# Altium PCB PCB.PcbDoc (part 1 of 2)
Units mm, origin at the board's own origin, x right, y up, seen from the top; angles counter-clockwise.
Board outline 100.25 x 100.25 mm, 2 copper layers (Top Layer, Bottom Layer); 95 components, 92 nets, 457 pads, 117 vias.
Unrouted connection lines stored in the file: 24.
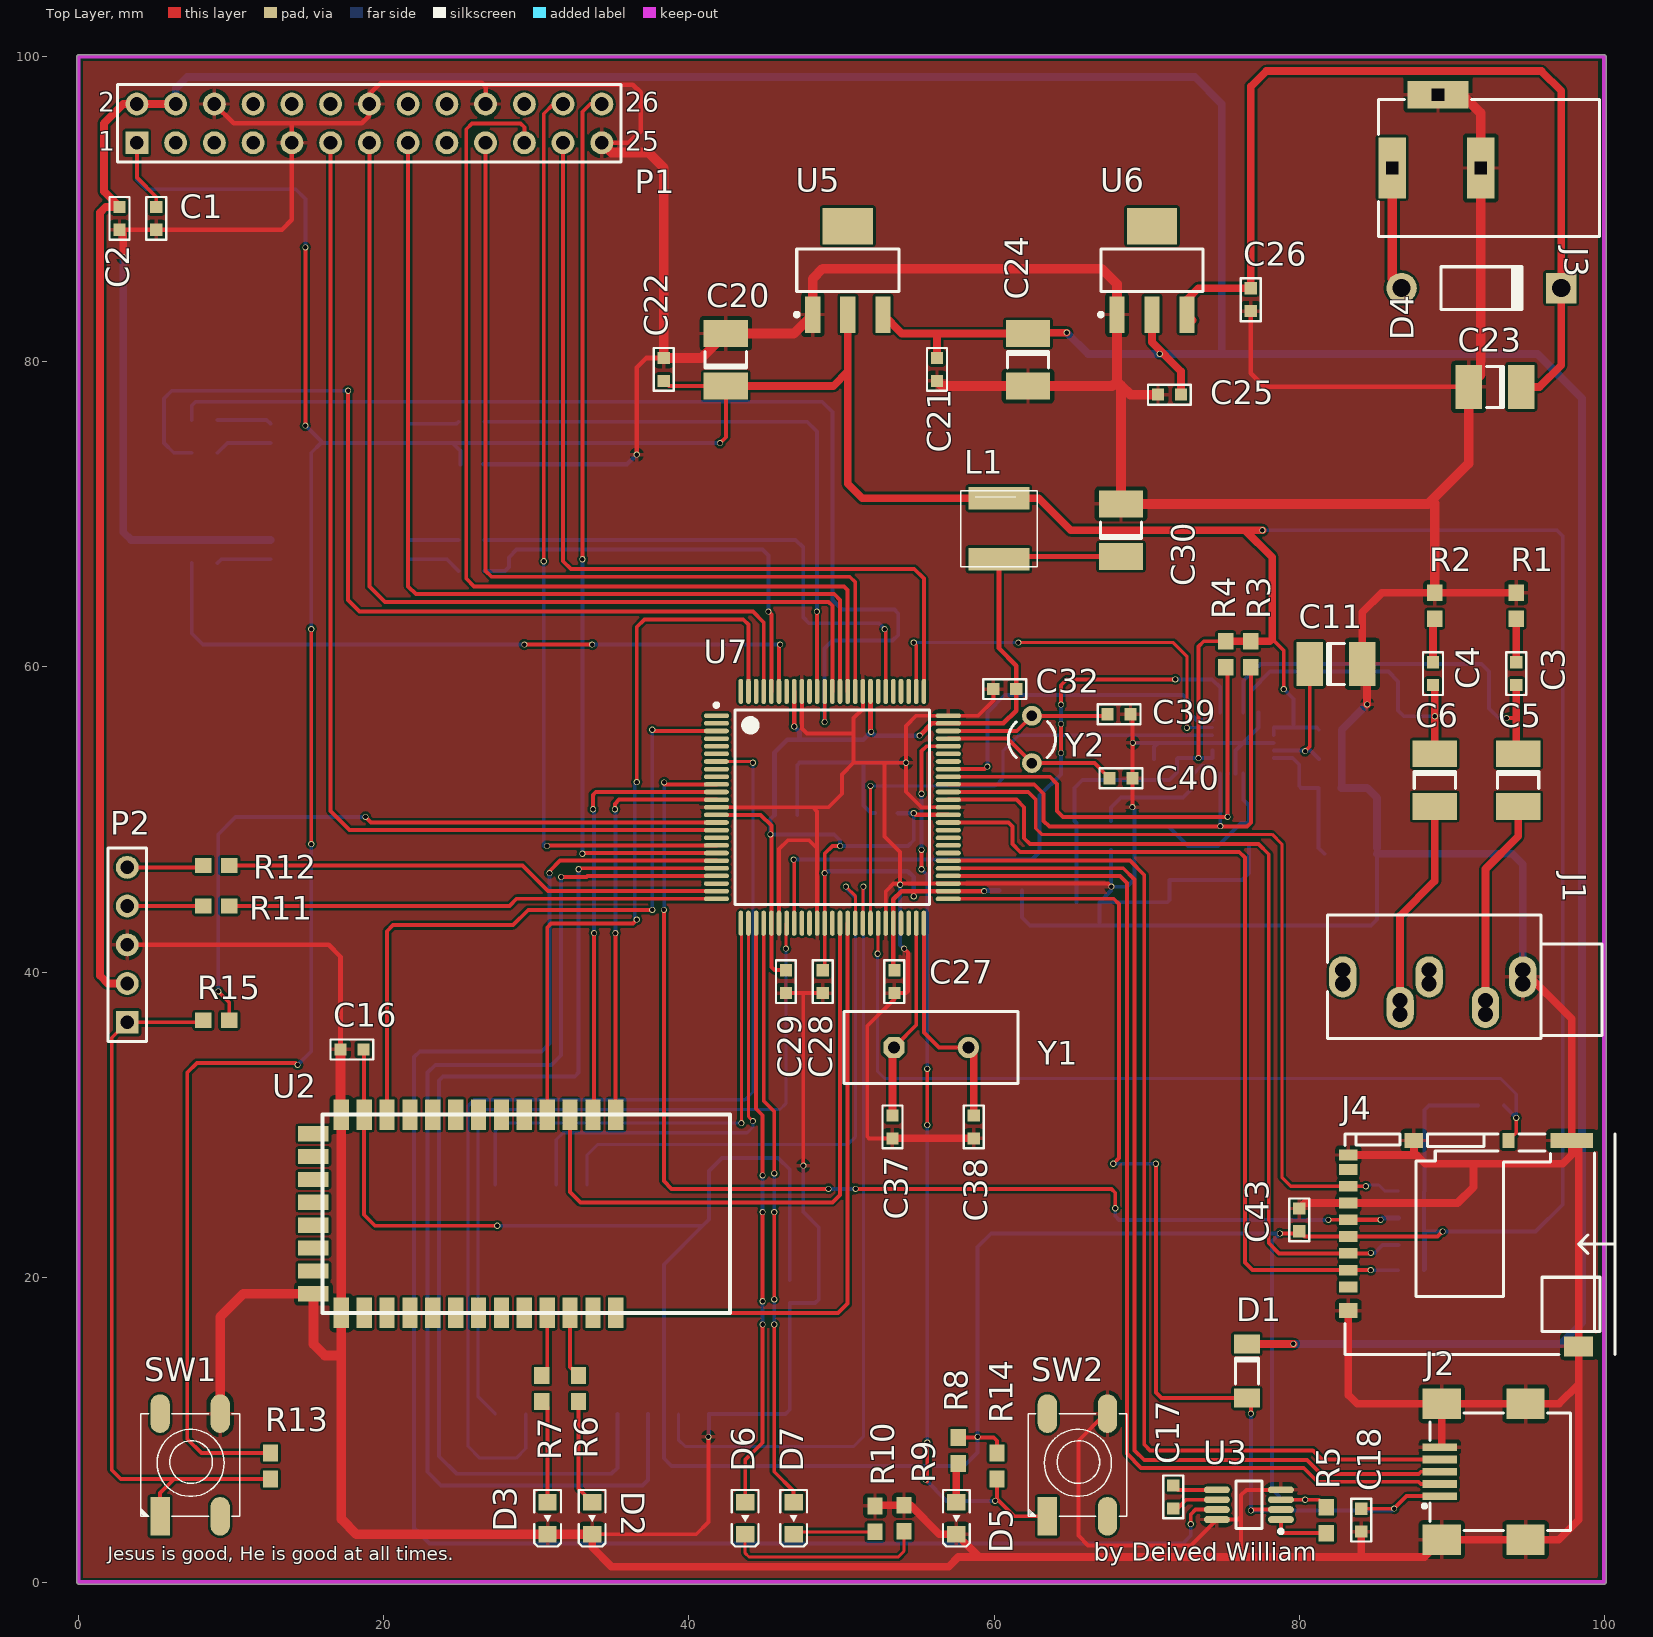
[diagram p0: Top Layer view]
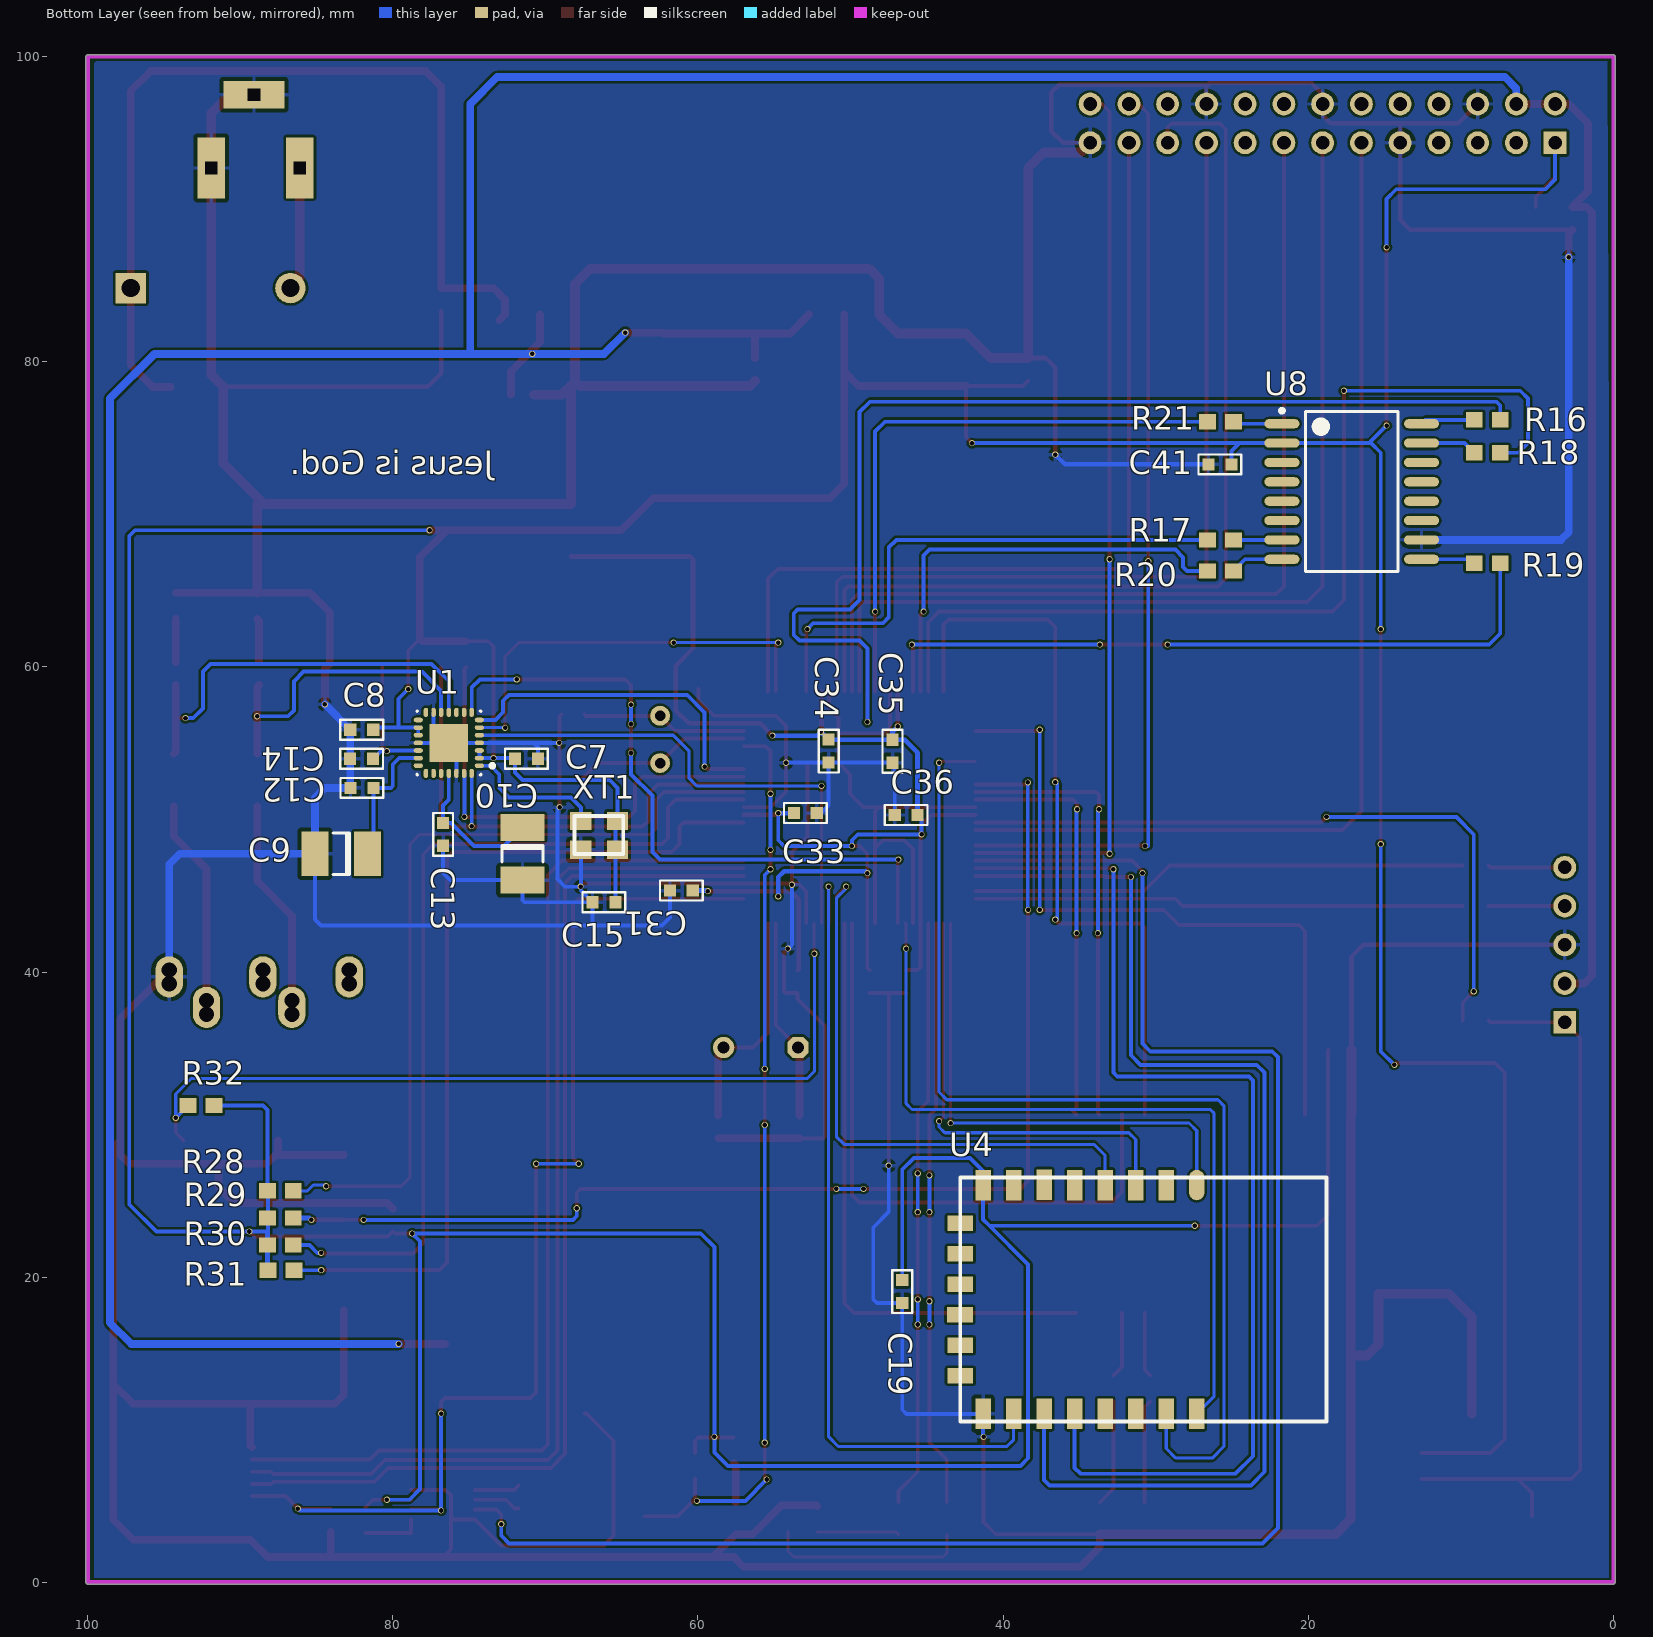
[diagram p1: Bottom Layer view, seen from below]

## Layer stack, top to bottom
Top Solder: solder mask 0.0102, Solder Resist, Dk 3.5
Top Layer: signal copper 0.0356
Dielectric 1: dielectric 0.32, FR-4, Dk 4.8
Bottom Layer: signal copper 0.0356
Bottom Solder: solder mask 0.0102, Solder Resist, Dk 3.5

## Board outline
-0.127,0 ccw(c0,0) 0,-0.127 100,-0.127 ccw(c100,0) 100.127,0 100.127,100 ccw(c100,100) 100,100.127 0,100.127 ccw(c0,100) -0.127,100

## Design rules (kind name [scope] priority, off if disabled: settings)
Clearance Clearance_1 [InPolygon] p1: gap=0.152 ignorepadtopadclearanceinfootprint=FALSE
Clearance [U7-InPolygon] p2: gap=0.1 ignorepadtopadclearanceinfootprint=FALSE except(0: Arc-Hole Track-Hole SMDPad-Hole THPad-Hole Via-Hole Fill-Hole Poly-Hole Region-Hole Text-Hole)
DiffPairsRouting [All] p1: maxlimit=1 minlimit=0.1 mostfreqgap=0.254 toplayer_minwidth=0.1 toplayer_maxwidth=1 toplayer_prefwidth=0.254 bottomlayer_minwidth=0.1 bottomlayer_maxwidth=1 bottomlayer_prefwidth=0.254 maxuncoupledlength=12.7
HoleSize [All] p1: absolutevalues=TRUE maxlimit=10 minlimit=0.025 maxpercent=80.000 minpercent=20.000
MinimumSolderMaskSliver [All] p1: minsoldermaskwidth=0.1
PolygonConnect [All] p1: connectstyle=Relief reliefconductorwidth=0.254 reliefentries=4 polygonreliefangle="90 Angle" airgapwidth=0.254
RoutingVias [All] p1: holewidth=0.3 width=0.4 viastyle="Through Hole" minholewidth=0.3 minwidth=0.4 maxholewidth=0.3 maxwidth=0.4
SilkToSilkClearance [All] p1: silktosilkclearance=0.1
SilkToSolderMaskClearance [IsPad] p1: minsilkscreentomaskgap=0.1 clearancetoexposedcopper=TRUE
SolderMaskExpansion [All] p1: expansion=0.1
Width [All] p1: maxlimit=2 minlimit=0.1 preferedwidth=0.254
25 further rules are at their usual default settings.

## Classes and differential pairs
component class CODEC: C3 C4 C5 C6 C7 C8 C9 C10 C11 C12 C13 C14 C15 J1 R1 R2 R3 R4 U1 XT1
component class Communication: C16 C17 C18 C19 D1 D2 D3 J2 R5 R6 R7 U2 U3 U4
component class "Decoupling Capacitors": C20 C21 C22 C23 C24 C25 C26 D4 D5 J3 R8 U5 U6
component class LCD: C1 C2 P1
component class MCU: C27 C28 C29 C30 C31 C32 C33 C34 C35 C36 C37 C38 C39 C40 D6 D7 L1 P2 R9 R10 R11 R12 R13 R14 R15 SW1 SW2 U7 Y1 Y2
component class "Memory Nor Flash": C41 R16 R17 R18 R19 R20 R21 U8
component class "SD CARD": C43 J4 R28 R29 R30 R31 R32
differential pair D: +D_P -D_N

## Components (designator, comment, footprint, x,y, rotation, side; value= is the part's Value field where it differs from the comment)
C1 "885012206020" "WCAP-CSGP_0603, 1.6x0.8x0.8mm_Reflow" 5.08,89.408 r90 top value=100nF
C2 "885012206020" "WCAP-CSGP_0603, 1.6x0.8x0.8mm_Reflow" 2.667,89.408 r90 top value=100nF
C3 "885012206020" "WCAP-CSGP_0603, 1.6x0.8x0.8mm_Reflow" 94.234,59.563 r90 top value=100nF
C4 "885012206020" "WCAP-CSGP_0603, 1.6x0.8x0.8mm_Reflow" 88.773,59.563 r90 top value=100nF
C5 "CC106D004M" D 94.361,52.578 r270 top value=10uF
C6 "CC106D004M" D 88.9,52.578 r270 top value=10uF
C7 "885012206020" "WCAP-CSGP_0603, 1.6x0.8x0.8mm_Reflow" 71.247,53.975 r0 bottom value=100nF
C8 "885012206020" "WCAP-CSGP_0603, 1.6x0.8x0.8mm_Reflow" 82.042,55.88 r180 bottom value=100nF
C9 "CC106D004M" D 83.386,47.752 r0 bottom value=10uF
C10 "CC106D004M" D 71.501,47.752 r270 bottom value=10uF
C11 "CC106D004M" D 82.423,60.198 r0 top value=10uF
C12 "885012206020" "WCAP-CSGP_0603, 1.6x0.8x0.8mm_Reflow" 82.03,52.07 r180 bottom value=100nF
C13 "885012206020" "WCAP-CSGP_0603, 1.6x0.8x0.8mm_Reflow" 76.708,49.022 r90 bottom value=100nF
C14 "885012206020" "WCAP-CSGP_0603, 1.6x0.8x0.8mm_Reflow" 82.054,53.975 r180 bottom value=100nF
C15 "885012206020" "WCAP-CSGP_0603, 1.6x0.8x0.8mm_Reflow" 66.167,44.577 r0 bottom value=100nF
C16 "885012206020" "WCAP-CSGP_0603, 1.6x0.8x0.8mm_Reflow" 17.907,34.925 r0 top value=100nF
C17 "885012106022" "WCAP-CSGP_0603, 1.6x0.8x0.8mm_Reflow" 71.755,5.588 r90 top value=1uF
C18 "885012206020" "WCAP-CSGP_0603, 1.6x0.8x0.8mm_Reflow" 84.074,4.064 r90 top value=100nF
C19 "885012206020" "WCAP-CSGP_0603, 1.6x0.8x0.8mm_Reflow" 46.609,19.05 r270 bottom value=100nF
C20 "CC106D004M" D 42.418,80.137 r90 top value=10uF
C21 "885012206020" "WCAP-CSGP_0603, 1.6x0.8x0.8mm_Reflow" 56.261,79.502 r90 top value=100nF
C22 "885012206020" "WCAP-CSGP_0603, 1.6x0.8x0.8mm_Reflow" 38.354,79.502 r270 top value=100nF
C23 "CC106D004M" D 92.837,78.359 r180 top value=10uF
C24 "CC106D004M" D 62.23,80.137 r270 top value=10uF
C25 "885012206020" "WCAP-CSGP_0603, 1.6x0.8x0.8mm_Reflow" 71.501,77.851 r0 top value=100nF
C26 "885012206020" "WCAP-CSGP_0603, 1.6x0.8x0.8mm_Reflow" 76.835,84.074 r90 top value=100nF
C27 "885012206020" "WCAP-CSGP_0603, 1.6x0.8x0.8mm_Reflow" 53.467,39.37 r270 top value=100nF
C28 "885012206020" "WCAP-CSGP_0603, 1.6x0.8x0.8mm_Reflow" 48.768,39.37 r270 top value=100nF
C29 "885012206020" "WCAP-CSGP_0603, 1.6x0.8x0.8mm_Reflow" 46.355,39.37 r270 top value=100nF
C30 "CC106D004M" D 68.326,68.961 r90 top value=10uF
C31 "885012206020" "WCAP-CSGP_0603, 1.6x0.8x0.8mm_Reflow" 61.087,45.339 r0 bottom value=100nF
C32 "885012206020" "WCAP-CSGP_0603, 1.6x0.8x0.8mm_Reflow" 60.706,58.547 r180 top value=100nF
C33 "885012206020" "WCAP-CSGP_0603, 1.6x0.8x0.8mm_Reflow" 52.959,50.419 r180 bottom value=100nF
C34 "885012206020" "WCAP-CSGP_0603, 1.6x0.8x0.8mm_Reflow" 51.435,54.483 r270 bottom value=100nF
C35 "885012206020" "WCAP-CSGP_0603, 1.6x0.8x0.8mm_Reflow" 47.244,54.471 r270 bottom value=100nF
C36 "885012206020" "WCAP-CSGP_0603, 1.6x0.8x0.8mm_Reflow" 46.355,50.292 r0 bottom value=100nF
C37 "885012006004" "WCAP-CSGP_0603, 1.6x0.8x0.8mm_Reflow" 53.34,29.845 r90 top value=22pF
C38 "885012006004" "WCAP-CSGP_0603, 1.6x0.8x0.8mm_Reflow" 58.674,29.845 r90 top value=22pF
C39 "885012006004" "WCAP-CSGP_0603, 1.6x0.8x0.8mm_Reflow" 68.199,56.896 r180 top value=22pF
C40 "885012006004" "WCAP-CSGP_0603, 1.6x0.8x0.8mm_Reflow" 68.326,52.705 r180 top value=22pF
C41 "885012206020" "WCAP-CSGP_0603, 1.6x0.8x0.8mm_Reflow" 25.781,73.279 r0 bottom value=100nF
C43 "885012206020" "WCAP-CSGP_0603, 1.6x0.8x0.8mm_Reflow" 80.01,23.749 r270 top value=100nF
D1 "1N5817" MELFDIODE 76.581,15.621 r270 top
D2 "150080BS75000" WL-SMCW_0805 33.655,4.191 r90 top
D3 "150080BS75000" WL-SMCW_0805 30.734,4.191 r90 top
D4 "Diode 1N4001" DO-41 91.948,84.836 r0 top
D5 "150080BS75000" WL-SMCW_0805 57.531,4.191 r90 top
D6 "150080BS75000" WL-SMCW_0805 43.688,4.191 r90 top
D7 "150080BS75000" WL-SMCW_0805 46.863,4.191 r90 top
J1 "Phonejack Stereo SW" ST-3150-5N 99.869,38.832 r270 top
J2 "651305142821" 651305142821 93.091,7.239 r90 top
J3 "694108301002" 694108301002 92.456,92.71 r90 top
J4 "DM3AT-SF-PEJM5" "SD CARD MICRO" 83.026,28.006 r270 top
L1 "1uH" TAIYO-NLS5012-GENERIC 60.325,71.056 r270 top
P1 "Header 13X2" HDR2X13 3.81,94.361 r0 top
P2 "Header 5" HDR1X5 3.175,36.703 r90 top
R1 "10R" 3-0603 94.234,64.008 r90 top
R2 "10R" 3-0603 88.9,64.008 r90 top
R3 "2k2" 3-0603 76.835,60.833 r90 top
R4 "2k2" 3-0603 75.184,60.833 r90 top
R5 "DNP" 3-0603 81.788,4.064 r270 top
R6 "470R" 3-0603 32.766,12.7 r90 top
R7 "470R" 3-0603 30.353,12.7 r90 top
R8 "470R" 3-0603 57.658,8.636 r270 top
R9 "100R" 3-0603 54.102,4.191 r270 top
R10 "100R" 3-0603 52.197,4.152 r270 top
R11 "100R" 3-0603 9.017,44.323 r180 top
R12 "100R" 3-0603 9.017,46.99 r180 top
R13 "10k" 3-0603 12.573,7.62 r90 top
R14 "10k" 3-0603 60.198,7.62 r90 top
R15 "100R" 3-0603 9.017,36.83 r0 top
R16 "50R" 3-0603 8.255,76.2 r0 bottom
R17 "50R" 3-0603 25.742,68.326 r0 bottom
R18 "50R" 3-0603 8.255,74.041 r0 bottom
R19 "50R" 3-0603 8.255,66.802 r180 bottom
R20 "50R" 3-0603 25.742,66.294 r180 bottom
R21 "50R" 3-0603 25.742,76.073 r0 bottom
R28 "2k2" 3-0603 87.376,25.654 r180 bottom
R29 "2k2" 3-0603 87.376,23.876 r180 bottom
R30 "2k2" 3-0603 87.376,22.098 r180 bottom
R31 "2k2" 3-0603 87.337,20.447 r180 bottom
R32 "2k2" 3-0603 92.583,31.242 r180 bottom
SW1 "SW-PB-BLACK-SMD" SW-PB-SMD 5.334,4.318 r90 top
SW2 "SW-PB-BLACK-SMD" SW-PB-SMD 63.5,4.318 r90 top
U1 "ES8328" QFN-28L 76.335,55.023 r0 bottom
U2 "HC-05" LCC42 15.985,30.653 r270 top
U3 "MCP1253-ADJI/MS" MSOP-MS8_N 76.708,5.08 r180 top
U4 "ESP8266" LCC28 35.067,18.547 r270 bottom
U5 "LM1117MP-3.3/NOPB" MP04A_N 50.419,86 r90 top
U6 "LM1117IMP-5.0/NOPB" MP04A_N 70.358,86 r90 top
U7 "PIC32MZ1024ECG100-E/PF" MCHP-TQFP-PF100_N 49.403,50.8 r0 top
U8 "N25Q128A13ESF40E" MICT-SF-16_N 17.142,71.501 r180 bottom
XT1 "YSO531SR" CRISTAL 64.048,50.706 r0 bottom
Y1 "ECS-20-20-1" HC-49U 55.88,35.052 r0 top
Y2 "XTAL" R38 62.484,55.245 r0 top

## Footprints (in the part's own frame and the unit in brackets; to place one, negate y for a bottom-side part, rotate by r counter-clockwise, add the part's x,y. Pads: shape width x height; smd on the part's side, far side on the other; paste and mask are expansions set on the pad)
3-0603 [mm] "Chip Resistor; Body 1.6 x 0.9 mm (LxW typ)"
  rect 1.1x1 smd: 1(-0.85,0) 2(0.85,0)
651305142821 [mm] "Mini USB 2.0 Type AB SMT Horizontal 5 Contacts"
  rect 0.5x2.25 smd: 1(-1.6,3.865) 2(-0.8,3.865) 3(0,3.865) 4(0.8,3.865) 5(1.6,3.865)
  rect 2x2.5 smd: Shell(-4.45,-1.76) Shell(-4.45,3.74) Shell(4.45,-1.76) Shell(4.45,3.74)
  silkscreen extent -3.85,-4.7 3.85,4.99, body extent -4.95,-4.7 4.95,4.7, height 4.1
694108301002 [mm] "DC Power Jack Right Angled(6.4)"
  rect 4x1.8 hole 0.8 square: 1(0,6.35) 2(0,0.55)
  rect 1.8x4 hole 0.8 square: 3(4.8,3.35)
  silkscreen extent -4.5,-7.25 4.5,7.25, body extent -4.5,-7.25 5,7.25, height 10.75
CRISTAL [mm]
  rect 1.4x1.2 smd: 1(1.23,2.7) 2(3.63,2.7) 3(3.63,0.8) 4(1.23,0.8)
  silkscreen extent 0.85,0.48 4.05,2.97
D [mm] "Chip Capacitor; Body 3.81 x 2.54 mm (LxW typ)"
  rect 1.75x2.9 smd: 1(-1.725,0) 2(1.725,0)
  silkscreen extent -0.55,-1.35 0.55,1.35
DO-41 [mm] "Diode, Axial; Body 5.2 x 2.7 mm (LxDia. max), Lead Dia. 0.86 mm (max)"
  round 2 hole 1.2: 1(-5.23,0)
  rect 2x2 hole 1.2: 2(5.23,0)
  silkscreen extent -2.65,-1.4 2.75,1.4
HC-49U [mm] "Quartz Crystal, Thru-Hole; 2 Leads; Body 11.35 x 4.65 x 13.46 mm (LxWxH max)"
  oct 1.4x1.4 hole 0.8: 1(-2.44,0)
  round 1.4 hole 0.8: 2(2.44,0)
  silkscreen extent -5.7,-2.35 5.7,2.35
HDR1X5 [mm] "Connector; Header; 5 Position"
  rect 1.5x1.5 hole 0.9: 1(0,0)
  round 1.5 hole 0.9: 2(2.54,0) 3(5.08,0) 4(7.62,0) 5(10.16,0)
  silkscreen extent -1.27,-1.27 11.43,1.27
HDR2X13 [mm] "Connector; Header; 13x2 Position"
  rect 1.5x1.5 hole 0.9: 1(0,0)
  round 1.5 hole 0.9: 2(0,2.54) 3(2.54,0) 4(2.54,2.54) 5(5.08,0) 6(5.08,2.54) 7(7.62,0) 8(7.62,2.54) 9(10.16,0) 10(10.16,2.54) 11(12.7,0) 12(12.7,2.54) 13(15.24,0) 14(15.24,2.54) 15(17.78,0) 16(17.78,2.54) 17(20.32,0) 18(20.32,2.54) 19(22.86,0) 20(22.86,2.54) 21(25.4,0) 22(25.4,2.54) 23(27.94,0) 24(27.94,2.54) 25(30.48,0) 26(30.48,2.54)
  silkscreen extent -1.27,-1.27 31.75,3.81
LCC28 [mm]
  oval 2x1 smd: 1(-7.488,7.762)
  rect 2x1 smd: 2(-7.488,5.762) 3(-7.488,3.763) 4(-7.488,1.763) 5(-7.488,-0.237) 6(-7.513,-2.237) 7(-7.488,-4.237) 8(-7.488,-6.237) 15(7.513,-6.237) 16(7.513,-4.237) 17(7.513,-2.237) 18(7.513,-0.237) 19(7.513,1.763) 20(7.513,3.763) 21(7.513,5.762) 22(7.513,7.762)
  rect 1x1.7 smd: 9(-4.987,-7.738) 10(-2.987,-7.738) 11(-0.988,-7.738) 12(5.012,-7.738) 13(1.012,-7.762) 14(3.012,-7.738)
  silkscreen extent -7.99,-7.74 8.01,16.26
LCC42 [mm]
  rect 2x1 smd: 1(0,19.225) 2(0,17.725) 3(0,16.225) 4(0,14.725) 5(0,13.225) 6(0,11.725) 7(0,10.225) 8(0,8.725) 9(0,7.225) 10(0,5.725) 11(0,4.225) 12(0,2.725) 13(0,1.225) 22(13,1.225) 23(13,2.725) 24(13,4.225) 25(13,5.725) 26(13,7.225) 27(13,8.725) 28(13,10.225) 29(13,11.725) 30(13,13.225) 31(13,14.725) 32(13,16.225) 33(13,17.725) 34(13,19.225)
  rect 1x2 smd: 14(1.25,-0.6) 15(2.75,-0.6) 16(4.25,-0.6) 17(5.75,-0.6) 18(7.25,-0.6) 19(8.75,-0.6) 20(10.25,-0.6) 21(11.75,-0.6)
  silkscreen extent -0.03,0 13,26.7
MCHP-TQFP-PF100_N [mm] "QFP, 100-Leads, Body 14x14mm, Pitch 0.5mm, IPC Medium Density"
  oval 1.65x0.3 smd: 1(-7.6,6) 2(-7.6,5.5) 3(-7.6,5) 4(-7.6,4.5) 5(-7.6,4) 6(-7.6,3.5) 7(-7.6,3) 8(-7.6,2.5) 9(-7.6,2) 10(-7.6,1.5) 11(-7.6,1) 12(-7.6,0.5) 13(-7.6,0) 14(-7.6,-0.5) 15(-7.6,-1) 16(-7.6,-1.5) 17(-7.6,-2) 18(-7.6,-2.5) 19(-7.6,-3) 20(-7.6,-3.5) 21(-7.6,-4) 22(-7.6,-4.5) 23(-7.6,-5) 24(-7.6,-5.5) 25(-7.6,-6) 51(7.6,-6) 52(7.6,-5.5) 53(7.6,-5) 54(7.6,-4.5) 55(7.6,-4) 56(7.6,-3.5) 57(7.6,-3) 58(7.6,-2.5) 59(7.6,-2) 60(7.6,-1.5) 61(7.6,-1) 62(7.6,-0.5) 63(7.6,0) 64(7.6,0.5) 65(7.6,1) 66(7.6,1.5) 67(7.6,2) 68(7.6,2.5) 69(7.6,3) 70(7.6,3.5) 71(7.6,4) 72(7.6,4.5) 73(7.6,5) 74(7.6,5.5) 75(7.6,6)
  oval 0.3x1.65 smd: 26(-6,-7.6) 27(-5.5,-7.6) 28(-5,-7.6) 29(-4.5,-7.6) 30(-4,-7.6) 31(-3.5,-7.6) 32(-3,-7.6) 33(-2.5,-7.6) 34(-2,-7.6) 35(-1.5,-7.6) 36(-1,-7.6) 37(-0.5,-7.6) 38(0,-7.6) 39(0.5,-7.6) 40(1,-7.6) 41(1.5,-7.6) 42(2,-7.6) 43(2.5,-7.6) 44(3,-7.6) 45(3.5,-7.6) 46(4,-7.6) 47(4.5,-7.6) 48(5,-7.6) 49(5.5,-7.6) 50(6,-7.6) 76(6,7.6) 77(5.5,7.6) 78(5,7.6) 79(4.5,7.6) 80(4,7.6) 81(3.5,7.6) 82(3,7.6) 83(2.5,7.6) 84(2,7.6) 85(1.5,7.6) 86(1,7.6) 87(0.5,7.6) 88(0,7.6) 89(-0.5,7.6) 90(-1,7.6) 91(-1.5,7.6) 92(-2,7.6) 93(-2.5,7.6) 94(-3,7.6) 95(-3.5,7.6) 96(-4,7.6) 97(-4.5,7.6) 98(-5,7.6) 99(-5.5,7.6) 100(-6,7.6)
  silkscreen extent -7.72,-6.37 6.37,6.82, body extent -7,-7 7,7, height 1.2
MELFDIODE [mm]
  rect 1.25x1.7 smd: 1(3.55,0) 2(0,0)
  silkscreen extent 0.92,-0.75 2.63,0.75
MICT-SF-16_N [mm] "SOIC, 16-Leads, Body 10.3x7.5mm, Pitch 1.27mm, IPC Medium Density"
  oval 2.3x0.6 smd: 1(-4.575,4.445) 2(-4.575,3.175) 3(-4.575,1.905) 4(-4.575,0.635) 5(-4.575,-0.635) 6(-4.575,-1.905) 7(-4.575,-3.175) 8(-4.575,-4.445) 9(4.575,-4.445) 10(4.575,-3.175) 11(4.575,-1.905) 12(4.575,-0.635) 13(4.575,0.635) 14(4.575,1.905) 15(4.575,3.175) 16(4.575,4.445)
  silkscreen extent -4.7,-5.25 3.02,5.42, body extent -3.8,-5.25 3.8,5.25, height 0.1
MP04A_N [mm] "SOT223, 4-Leads, Body 6.5x3.5mm, Pitch 2.3mm, Lead Span 7mm, IPC Medium Density"
  rect 2.4x1 smd: 1(-2.9,2.3) 2(-2.9,0) 3(-2.9,-2.3)
  rect 2.4x3.3 smd: 4(2.9,0)
  silkscreen extent -3.02,-3.35 1.4,3.47, body extent -1.85,-3.35 1.85,3.35, height 1.8
MSOP-MS8_N [mm] "TSOP, 8-Leads, Body 3x3mm, Pitch 0.65mm, IPC Medium Density"
  oval 1.7x0.45 smd: 1(-2.1,0.975) 2(-2.1,0.325) 3(-2.1,-0.325) 4(-2.1,-0.975) 5(2.1,-0.975) 6(2.1,-0.325) 7(2.1,0.325) 8(2.1,0.975)
  silkscreen extent -2.22,-1.55 0.85,1.87, body extent -1.6,-1.6 1.6,1.6, height 1.1
QFN-28L [mm]
  oval 0.6x0.3 smd: 1(-2,1.5) 2(-2,1) 3(-2,0.5) 4(-2,0) 5(-2,-0.5) 6(-2,-1) 7(-2,-1.5) 15(2,-1.5) 16(2,-1) 17(2,-0.5) 18(2,0) 19(2,0.5) 20(2,1) 21(2,1.5)
  oval 0.3x0.6 smd: 8(-1.5,-2) 9(-1,-2) 10(-0.5,-2) 11(0,-2) 12(0.5,-2) 13(1,-2) 14(1.5,-2) 22(1.5,2) 23(1,2) 24(0.5,2) 25(0,2) 26(-0.5,2) 27(-1,2) 28(-1.5,2)
  rect 2.5x2.5 smd: 29(0,0)
  silkscreen extent -2.97,-2.1 2.1,2.1, body extent -2.08,-2.07 2.07,2.07, height 0.8
R38 [mm] "Crystal, Thru-Hole; 2 Leads; Body 3.1 x 8.2 mm (Dia.xH)"
  round 1.3 hole 0.7: 1(0,1.55) 2(0,-1.55)
  silkscreen extent -1.55,-1.19 1.55,1.17
"SD CARD MICRO" [mm]
  rect 0.7x1.2 smd: 1(8.65,0.2) 2(7.55,0.2) 3(6.45,0.2) 4(5.35,0.2) 5(4.25,0.2) 6(3.15,0.2) 7(2.05,0.2)
  rect 0.7x1.2 smd mask+0.07: 8(0.95,0.2) 9(0,0.2)
  rect 1x1.2 smd: 10(-0.95,4.5) 14(10.2,0.2)
  rect 1x0.8 smd: 11(-0.95,10.7)
  rect 1x2.8 smd: 12(-0.95,14.85)
  rect 1.3x1.9 smd: 13(12.55,15.3)
  silkscreen extent -1.38,-0.03 13.09,17.7, body extent -0.98,0.15 12.88,16.3, height 1.68
ST-3150-5N [mm] "Connector; Stereo Jack, 3.5mm, 5 Position"
  oval 2.7x1.8 all layers, no hole: 1(-0.85,-5.2) 2(1.15,-7.65) 3(-0.85,-11.35) 4(1.15,-13.25) 5(-0.85,-17)
  round 1.2 hole 1: 1A(-1.3,-5.2) 1B(-0.4,-5.2) 2A(0.7,-7.65) 2B(1.6,-7.65) 3A(-1.3,-11.35) 3B(-0.4,-11.35) 4A(0.7,-13.25) 4B(1.6,-13.25) 5A(-1.3,-17) 5B(-0.4,-17)
  silkscreen extent -4.9,-18 3.2,0
SW-PB-SMD [mil]
  rect 100x50 smd: 1(0,0)
  oval 100x50 smd: 2(265,-155) 3(0,-155) 4(265,0)
  silkscreen extent 0,-205 265,50, body extent -28,-206 297,50, height 140
TAIYO-NLS5012-GENERIC [mm] "TAIYO YUDEN NLS5012 BODY"
  rect 1.5x4 smd: 1(0,0) 2(4,0)
  silkscreen extent -0.5,-2.5 4.5,2.5, body extent -0.4,-2.5 4.4,2.5, height 1.21
"WCAP-CSGP_0603, 1.6x0.8x0.8mm_Reflow" [mm] "Ceramic Capacitors, size 0603, body 1.6x0.8x0.8mm"
  rect 0.8x0.8 smd: 1(-0.75,0) 2(0.75,0)
  silkscreen extent -1.4,-0.65 1.4,0.65, body extent -0.8,-0.4 0.8,0.4, height 0.83
WL-SMCW_0805 [mm] "SMD Mono-color Chip LED, body 2.0x1.25mm"
  rect 1.1x1.2 smd: 1(-1.05,0) 2(1.05,0)
  silkscreen extent -1.85,-0.88 1.85,0.88, body extent -1,-0.62 1,0.63, height 0.7

## Part data
C1 C2 C3 C4 C7 C8 C12 C13 C14 C15 C16 C18 C19 C21 C22 C25 C26 C27 C28 C29 C31 C32 C33 C34 C35 C36 C41 C43: "WCAP-CSGP Ceramic Capacitors, size 0603, 1.6x0.8x0.8mm, 10V, X7R, 100nF", Rated Voltage="10V DC", Ceramic Type=X7R, ComponentLink1Description=Manufacturer, ComponentLink1URL=http://www.we-online.de, ComponentLink2Description=Datasheet, ComponentLink2URL=http://katalog.we-online.de/pbs/datasheet/885012206020.pdf, Part Number=885012206020, Published Date="June 2017", Publisher="Wurth Elektronik", Size="0603, 1.6x0.8x0.8mm"
C5 C6 C9 C10 C11 C20 C23 C24 C30: "Conformal Coated Solid Tantalum Chip Capacitor: Standard Range, 10uF, 20% Tolerance, 4 WVDC @ -55°C to +85°C, Surge = 5V", ComponentLink1Description="Manufacturer Link", ComponentLink1URL=http://www.vishay.com/, ComponentLink2Description=Datasheet, ComponentLink2URL=http://www.vishay.com/docs/43017/ccec.pdf, DatasheetDocument=21-Mar-2002, Note="See Data Sheet for full range of components", PackageReference=D, Published=19-Mar-2004, Publisher="Altium Limited"
C17: "WCAP-CSGP Ceramic Capacitors, size 0603, 1.6x0.8x0.8mm, 25V, X5R, 1uF", Rated Voltage="25V DC", Ceramic Type=X5R, ComponentLink1Description=Manufacturer, ComponentLink1URL=http://www.we-online.de, ComponentLink2Description=Datasheet, ComponentLink2URL=http://katalog.we-online.de/pbs/datasheet/885012106022.pdf, Part Number=885012106022, Published Date="June 2017", Publisher="Wurth Elektronik", Size="0603, 1.6x0.8x0.8mm"
C37 C38 C39 C40: "WCAP-CSGP Ceramic Capacitors, size 0603, 1.6x0.8x0.8mm, 10V, NP0, 22pF", Rated Voltage="10V DC", Ceramic Type=NP0, ComponentLink1Description=Manufacturer, ComponentLink1URL=http://www.we-online.de, ComponentLink2Description=Datasheet, ComponentLink2URL=http://katalog.we-online.de/pbs/datasheet/885012006004.pdf, Part Number=885012006004, Published Date="June 2017", Publisher="Wurth Elektronik", Size="0603, 1.6x0.8x0.8mm"
D1: "Schottky diode Barrier Rectifier"
D2 D3 D5 D6 D7: "WL-SMCW SMD Mono-color Chip LED Waterclear, size 0805, Blue", Emitting Color=Blue, Forward Voltage="3.2 V", ComponentLink1Description=Manufacturer, ComponentLink1URL=http://www.we-online.de, ComponentLink2Description=Datasheet, ComponentLink2URL=http://katalog.we-online.de/led/datasheet/150080BS75000.pdf, Part Number=150080BS75000, Peak Wavelength="465 nm", Published Date="Jan 2017", Publisher="Wurth Elektronik", Size=0805, Viewing Angle=140°
D4: "1 Amp General Purpose Rectifier", Code_JEDEC=DO-204-AL, ComponentLink1Description="Manufacturer Link", ComponentLink1URL=http://www.fairchildsemi.com/, ComponentLink2Description=Datasheet, ComponentLink2URL=http://www.fairchildsemi.com/ds/1N%2F1N4001.pdf, DatasheetVersion=1998, LatestRevisionDate=17-Jul-2002, LatestRevisionNote="Re-released for DXP Platform.", PackageDescription="Diode, Axial; Body 5.2 x 2.7 mm (LxDia. max), Lead Dia. 0.86 mm (max)", PackageReference=DO-41, PackageVersion=Aug-1999, Published=8-Jun-2000, Publisher="Altium Limited"
J1: "3-Conductor Jack with 2 break contacts (normals) and 2 auxiliary make contacts", ComponentLink1Description="Manufacturer Link", ComponentLink1URL=http://domino.kycon.com/internet/Products.html, DatasheetDocument=07-Mar-2000, LatestRevisionDate=17-Dec-2003, LatestRevisionNote="PCB Footprint replaced.", Published=5-Jan-2004, Publisher="Altium Limited"
J2: "Mini USB 2.0 Type AB SMT Horizontal 5 Contacts WR-COM", ComponentLink1Description=Manufacturer, ComponentLink1URL=http://www.we-online.de, ComponentLink2Description=Datasheet, ComponentLink2URL=http://katalog.we-online.de/em/datasheet/651305142821.pdf, Construction=SMT, Gender=Receptacle, Interface Type="Type AB", Part Number=651305142821, Published Date="April 2017", Publisher="Wurth Elektronik", Sub-Family="Mini USB 2.0", Type=Horizontal
J3: "DC Power Jack Right Angled(6.4) WR-DC", Rated Current="5 A", Withstanding Voltage="500 VAC", Working Voltage="24 VAC", ComponentLink1Description=Manufacturer, ComponentLink1URL=http://www.we-online.de, ComponentLink2Description=Datasheet, ComponentLink2URL=http://katalog.we-online.com/em/datasheet/6941xx301002.pdf, Opening Diameter="6.4 mm", Part Number=694108301002, Plug OD="5.5 mm", Published Date="September 2017", Publisher="Wurth Elektronik"
J4: "Conector micro SD push/push"
L1: library part 1U-NRS5012-TAIYO, "1U-NRS5012"
P1: "Header, 13-Pin, Dual row", LatestRevisionDate=17-Jul-2002, LatestRevisionNote="Re-released for DXP Platform.", Publisher="Altium Limited"
P2: "Header, 5-Pin", LatestRevisionDate=17-Jul-2002, LatestRevisionNote="Re-released for DXP Platform.", Publisher="Altium Limited"
R1 R2 R3 R4 R6 R7 R8 R9 R10 R11 R12 R13 R14 R15 R16 R17 R18 R19 R20 R21 R28 R29 R30 R31 R32: library part ERJ3RE, "Precision Thick Film Chip Resistor, 10 Ohm to 1M Ohm Range, 1% and 0.5% Tolerance, 0603 Size, 0.063 W", PackageDocument=Mar-2003, Code_IPC="1608 [0603]", ComponentLink1Description="Manufacturer Link", ComponentLink1URL=http://www.panasonic.com/industrial/components/resistive_products.htm, ComponentLink2Description=Datasheet, ComponentLink2URL=http://www.panasonic.com/industrial/components/pdf/AOA0000CE2.pdf, LatestRevisionDate=19-Mar-2004, LatestRevisionNote="Silkscreen size reduced.", PackageReference=3-0603, Published=17-Dec-2003, Publisher="Altium Limited"
R5: library part ERJ3RB, "Precision Thick Film Chip Resistor, 10 Ohm to 1M Ohm Range, 1% and 0.5% Tolerance, 0603 Size, 0.063 W", PackageDocument=Mar-2003, Code_IPC="1608 [0603]", ComponentLink1Description="Manufacturer Link", ComponentLink1URL=http://www.panasonic.com/industrial/components/resistive_products.htm, ComponentLink2Description=Datasheet, ComponentLink2URL=http://www.panasonic.com/industrial/components/pdf/AOA0000CE2.pdf, LatestRevisionDate=19-Mar-2004, LatestRevisionNote="Silkscreen size reduced.", PackageReference=3-0603, Published=17-Dec-2003, Publisher="Altium Limited"
SW1 SW2: "PUSHBUTTON SWITCH 6MM SMD"
U1: "Low Power Estereo Audio Codec With HeadPhone Amplifier"
U2: library part "Bluetooth HC-05", "Modulo Bluetooth HC-05"
U3: "Low Noise, Positive-Regulated Charge Pump, 1MHz, Adjustable Output, 8-Pin MSOP, Industrial Temperature", Supplier Part Number 1=MCP1253-ADJI/MS-ND, ComponentLink1Description=Datasheet, ComponentLink1URL=http://ww1.microchip.com/downloads/en/DeviceDoc/21752a.pdf, ComponentLink2Description="Packaging Specification", ComponentLink2URL=http://www.microchip.com/stellent/groups/techpub_sg/documents/packagingspec/en012702.pdf, ComponentLink3Description="Microchip.com Home", ComponentLink3URL=http://www.microchip.com/, DatasheetVersion="revA, Nov-2002", PackageDescription="8-Lead Plastic Micro Small Outline Package (MS) [MSOP]", PackageReference=MSOP-MS8, PackageVersion="revBB, Aug-2009", Published=29-Jan-2009, Publisher="Altium Limited", Supplier 1=Digi-Key, Supplier 2=Farnell, Supplier Part Number 2=1332068
U4: "Modulo WIFI ESP8266"
U5: "800mA Low-Dropout Linear Regulator, 4-pin SOT-223, Pb-Free", Manufacturer="National Semiconductor", PackageTopMarking=XYTT*N05A, PowerWise=N, Supplier Part Number 1=LM1117MP-3.3TR-ND, Code_IPC=SOT223-4, Code_JEDEC=TO-261-AA, ComponentLink1Description="LM1117 Datasheet", ComponentLink1URL=http://www.national.com/ds/LM/LM1117.pdf, ComponentLink2Description="LM1117 Web Page", ComponentLink2URL=http://www.national.com/pf/LM/LM1117.html, ComponentLink3Description="MP04A Package Page", ComponentLink3URL=http://www.national.com/packaging/folders/mp04a.html, CompType="LDO IC", DatasheetVersion=Apr-2006, PackageDescription="Molded SOT-223, 6.50 x 3.56 x 1.6mm Body, 4 Lead, 2.3mm Pitch", PackageReference=MP04A, PackageVersion="revB, Apr-2003", PartNumber=LM1117MP-3.3/NOPB, PinCount=4, Published=1-Mar-2010, Publisher="Altium Limited", RoHS=Y, Supplier 1=Digi-Key, Supplier 2=Digi-Key, Supplier 3=Digi-Key, Supplier 4=Farnell, Supplier Part Number 2=LM1117MP-3.3CT-ND, Supplier Part Number 3=LM1117MP-3.3DKR-ND, Supplier Part Number 4=1469054
U6: "800mA Low-Dropout Linear Regulator, 4-pin SOT-223, Pb-Free", Manufacturer="National Semiconductor", PackageTopMarking=XYTT*N06B, PowerWise=N, Supplier Part Number 1=LM1117IMP-5.0TR-ND, Code_IPC=SOT223-4, Code_JEDEC=TO-261-AA, ComponentLink1Description="LM1117 Datasheet", ComponentLink1URL=http://www.national.com/ds/LM/LM1117.pdf, ComponentLink2Description="LM1117 Web Page", ComponentLink2URL=http://www.national.com/pf/LM/LM1117.html, ComponentLink3Description="MP04A Package Page", ComponentLink3URL=http://www.national.com/packaging/folders/mp04a.html, CompType="LDO IC", DatasheetVersion=Apr-2006, PackageDescription="Molded SOT-223, 6.50 x 3.56 x 1.6mm Body, 4 Lead, 2.3mm Pitch", PackageReference=MP04A, PackageVersion="revB, Apr-2003", PartNumber=LM1117IMP-5.0/NOPB, PinCount=4, Published=1-Mar-2010, Publisher="Altium Limited", RoHS=Y, Supplier 1=Digi-Key, Supplier 2=Digi-Key, Supplier 3=Digi-Key, Supplier 4=Farnell, Supplier Part Number 2=LM1117IMP-5.0CT-ND, Supplier Part Number 3=LM1117IMP-5.0DKR-ND, Supplier Part Number 4=1469052
U7: "32-Bit Microcontroller with Audio and Graphics Interfaces, HS USB, Ethernet, and Advanced Analog, 1024 KB Program Memory, 78 I/O Pins, PMP, Extended Temperature, 100-Pin TQFP (PF100), Tray", Manufacturer=Microchip, Supplier Part Number 1=17X9269, ComponentLink1Description="Manufacturer URL", ComponentLink1URL=http://www.microchip.com/, ComponentLink2Description=Datasheet, ComponentLink2URL=http://ww1.microchip.com/downloads/en/DeviceDoc/60001191B.pdf, ComponentLink3Description="Package Specification", ComponentLink3URL=http://www.microchip.com/stellent/groups/techpub_sg/documents/packagingspec/en012702.pdf, DatasheetVersion="Rev. B", Mounting Technology="Surface Mount", PackageDescription="100-Lead Thin Plastic Quad Flat Pack, 14 x 14 mm Body, 0.5 mm Pitch", PackageReference=TQFP-PF100, PackageVersion="C04-110B, 12/2012", Packing=Tray, PartNumber=PIC32MZ1024ECG100-E/PF, Supplier 1=Newark, Supplier 2=Mouser, Supplier Part Number 2=579-1024ECG100-E/PF, VCC Range="2.2 to 3.6 V"
U8: "128 Mb (x1/x2/x4) Serial NOR Flash Memory with Multi I/O, 108 MHz, 2.7 to 3.6 V, 16-pin SO16 Wide (SF), Tray", Manufacturer=Micron, Package="SO16 Wide", Voltage=2.7V-3.6V, Applications=Embedded, ComponentLink1Description="Manufacturer URL", ComponentLink1URL=http://www.micron.com/, ComponentLink2Description=Datasheet, ComponentLink2URL=http://www.micron.com/~/media/Documents/Products/Data%20Sheet/NOR%20Flash/Serial%20NOR/N25Q/n25q_128mb_3v_65nm.pdf, ComponentLink3Description="Package Specification", ComponentLink3URL=http://www.micron.com/~/media/Documents/Products/Data%20Sheet/NOR%20Flash/Serial%20NOR/N25Q/n25q_1gb_3v_65nm.pdf, DatasheetVersion="Rev. L", Density=128Mb, Mounting Technology="Surface Mount", PackageDescription="16-Pin SO Wide, 7.5 X 10.3 mm, Pitch 1.27 mm", PackageReference=MICT-SF-16, PackageVersion="Rev. F", Part Family=N25Q, PartNumber=N25Q128A13ESF40E, Part Status=Production, RoHS=Yes, Speed="108 MHz", Type="Multi I/O", Width=x1/x2/x4
XT1: "Cristal Oscilator Active 1.8v - 3.3v"
Y1 Y2: "Crystal Oscillator", Publisher="Altium Limited"
  Y1: ComponentLink1Description="Manufacturer Link", ComponentLink1URL=http://www.ecsxtal.com/, ComponentLink2Description=Datasheet, ComponentLink2URL=http://www.ecsxtal.com/pdf2/HC49U.PDF, DatasheetDocument=18-Apr-2000, PackageReference=HC-49U, Published=17-Jul-2002
  Y2: LatestRevisionDate=17-Jul-2002, LatestRevisionNote="Re-released for DXP Platform.", PackageDescription="Crystal, Thru-Hole; 2 Leads; Body 3.1 x 8.2 mm (Dia.xH)", PackageReference=R38, Published=8-Jun-2000

## Via types
v1: diameter 0.4, hole 0.3, Top Layer to Bottom Layer, 117 vias

## Nets (pads, with @x,y where several pads share a name; then routed paths per layer and width w, separated by ;. In a path a pad name is that pad's centre, name@x,y a point inside that pad or via, vN(x,y) a via of type N, cw(c..) or ccw(c..) an arc to the next point about the centre after c; other vN are vias at no path point)
+3.3: C1.2 C7.2 C8.2 C15.1 C16.2 C19.1 C20.1 C22.2 C41.1 C43.2 J4.4 L1.1 P1.1 R3.2 R4.2 R5.1 R8.1 R13.2 R14.2 R28.1 R29.1 R30.1 R31.1 R32.2 U1.2 U1.3 U1.16 U1.17 U2.12 U3.3 U4.8 U5.2 U8.2 XT1.1 XT1.4 | length 494.9
  Top Layer w0.254: P1.1 3.81,92.075 5.08,90.805 C1.2 ; R13.2 8.04,8.47 7.112,9.398 7.112,33.401 7.747,34.036 14.224,34.036 v1(14.351,33.909) ; v1(14.859,75.819) v1(14.859,87.503) ; v1(15.24,48.387) v1(15.24,62.484) ; C16.2 18.71,34.872 U2.12 18.71,24.089 19.431,23.368 v1(27.432,23.368) ; C22.2 38.694,78.412 C20.1 42.418,75.057 v1(42.037,74.676) ; R8.1 59.983,9.486 60.198,9.271 R14.2 ; v1(73.406,54.023) 73.406,61.341 73.748,61.683 R4.2 ; 78.232,61.849 78.994,61.087 v1(78.994,58.547) ; v1(78.74,22.86) 79.871,22.86 C43.2 80.353,22.656 J4.4 89.077,22.656 v1(89.408,22.987) ; U3.3 v1(80.391,5.405) 81.297,5.405 R5.1
  Top Layer w0.508: C20.1 49.456,78.412 50.419,79.375 ; U5.2 50.419,79.375 ; R4.2 R3.2 78.066,61.683 78.232,61.849 78.232,67.183 76.454,68.961 ; v1(77.597,68.961) 76.454,68.961 ; 50.419,79.375 50.419,72.009 51.372,71.056 L1.1 62.929,71.056 65.024,68.961 76.454,68.961
  Bottom Layer w0.254: P1.1 3.81,91.948 4.445,91.313 14.224,91.313 14.859,90.678 v1(14.859,87.503) ; v1(14.351,33.909) 15.24,34.798 v1(15.24,48.387) ; v1(14.859,75.819) 15.875,74.803 15.875,74.676 ; v1(15.24,62.484) 15.24,74.041 15.875,74.676 ; C41.1 25.031,74.156 24.511,74.676 ; v1(27.432,23.368) 40.894,23.368 ; v1(42.037,74.676) 24.511,74.676 ; C19.1 46.609,27.051 45.847,27.813 42.164,27.813 41.305,26.954 U4.8 41.305,23.779 40.894,23.368 ; C15.1 65.417,49.767 XT1.4 65.278,52.07 65.786,52.578 71.501,52.578 71.997,53.074 C7.2 72.045,54.023 v1(73.406,54.023) U1.2 U1.3 ; v1(77.597,68.961) 96.901,68.961 97.282,68.58 97.282,24.765 95.504,22.987 v1(89.408,22.987) 88.265,22.987 88.265,20.525 R31.1 88.187,25.615 R28.1 88.226,30.949 88.519,31.242 R32.2 ; U1.17 U1.16 79.629,56.023 ; v1(78.994,58.547) 79.629,57.912 79.629,56.023 ; v1(80.391,5.405) 78.923,5.405 78.232,6.096 78.232,22.352 v1(78.74,22.86) 59.817,22.86 58.928,21.971 v1(58.928,9.525) 58.928,8.509 58.039,7.62 38.862,7.62 38.354,8.128 38.354,20.828 40.894,23.368 ; C8.2 81.149,56.023 79.629,56.023 ; 15.875,74.676 U8.2 24.511,74.676
+5: C2.2 C21.2 C24.1 C25.2 D1.2 P1.2 P1.4 P2.2 U5.3 U6.2 | length 290.6
  Top Layer w0.508: P2.2 1.905,39.243 1.397,39.751 1.397,89.789 1.766,90.158 C2.2 1.651,91.174 1.651,95.631 2.921,96.901 P1.2 P1.4 ; U5.3 53.957,81.862 56.261,81.862 ; C21.2 56.261,81.862 ; v1(64.77,81.915) 62.283,81.915 C24.1 56.261,81.862 ; U6.2 70.358,81.28 72.251,79.387 C25.2 ; D1.2 v1(79.629,15.621)
  Bottom Layer w0.508: P1.4 6.35,97.917 7.112,98.679 73.152,98.679 74.93,96.901 74.93,80.645 74.803,80.518 ; v1(64.77,81.915) 66.167,80.518 v1(70.866,80.518) 74.803,80.518 ; v1(79.629,15.621) 97.155,15.621 98.552,17.018 98.552,77.597 95.631,80.518 74.803,80.518
D_N: J2.2 U7.54 | length 71.4
  Top Layer w0.254: U7.54@57.003,46.292 U7.54@57.745,46.292 ; U7.54 68.254,46.3 68.707,45.847 68.707,8.426 69.64,7.493 80.308,7.493 81.216,6.585 87.828,6.585 87.974,6.439 J2.2
D_P: J2.3 U7.55 | length 70.7
  Top Layer w0.254: U7.55 68.472,46.8 69.215,46.057 69.215,8.636 69.85,8.001 80.518,8.001 81.426,7.093 87.828,7.093 87.974,7.239 J2.3
GND: C1.1 C2.1 C7.1 C8.1 C9.2 C10.2 C11.2 C12.1 C13.1 C14.1 C15.2 C16.1 C18.1 C19.2 C20.2 C21.1 C22.1 C23.2 C24.2 C25.1 C26.1 C27.2 C28.2 C29.2 C30.2 C31.2 C32.2 C33.2 C34.2 C35.2 C36.2 C37.1 C38.1 C39.1 C40.1 C41.2 C43.1 D2.1 D3.1 D5.1 J1.1 J1.1A J1.1B J2.5 J2.Shell J3.2 J3.3 J4.6 J4.9 J4.10 J4.12 J4.13 J4.14 P1.6 P1.9 P1.14 P1.20 P1.25 P2.3 R1.2 R2.2 R9.1 R10.1 SW1.2 SW2.2 U1.4 U1.13 U1.18 U1.26 U1.29 U2.13 U2.21 U2.22 U3.4 U3.8 U4.15 U5.1 U6.1 U7.13 U7.31 U7.36 U7.45 U7.53 U7.63 U7.75 U7.84 U7.92 U8.10 XT1.2 | length 837.5
  Top Layer w0.254: D2.1 40.479,3.141 41.275,3.937 v1(41.275,9.525) ; U7.13 48.133,50.8 ; U7.31 45.903,48.062 46.482,48.641 47.879,48.641 48.403,48.117 ; C29.2 47.498,38.62 ; U7.92 47.403,55.975 47.752,55.626 50.8,55.626 ; v1(47.498,27.305) 47.498,38.62 ; U7.36 48.403,48.117 ; C28.2 47.498,38.62 ; U7.84 51.403,57.245 50.8,56.642 50.8,55.626 ; U7.45 52.903,45.283 53.42,45.8 v1@53.848,45.8 ; C37.1 51.804,29.095 51.689,29.21 51.689,36.449 53.467,38.227 C27.2 54.241,38.62 54.356,38.735 54.356,41.275 v1(54.102,41.529) ; v1(53.848,45.72) v1@53.848,45.8 ; U7.63 55.245,50.8 54.229,51.816 v1(54.229,53.721) ; C32.2 59.956,57.797 58.959,56.8 U7.75 54.895,56.8 54.229,56.134 v1(54.229,53.721) ; SW2.2 67.31,11.049 65.532,9.271 65.532,3.048 66.167,2.413 72.916,2.413 U3.8 75.987,4.105 76.2,4.318 ; v1(67.691,45.593) 67.484,45.8 U7.53 v1@53.848,45.8 ; C39.1 69.076,56.769 v1@69.076,54.991 ; v1(69.076,50.812) C40.1 v1@69.076,54.991 ; v1(69.108,55.023) v1@69.076,54.991 ; 76.708,1.651 76.2,2.159 76.2,4.318 ; U3.4 76.54,6.055 76.2,5.715 76.2,4.318 ; 48.133,50.8 49.149,50.8 50.038,51.689 50.038,52.959 50.8,53.721 ; 48.133,50.8 48.403,50.53 48.403,48.117 ; 50.8,53.721 52.832,53.721 ; 50.8,53.721 50.8,55.626 ; 52.832,53.721 v1(54.229,53.721) ; 52.832,53.721 52.832,48.895 53.848,47.879 v1@53.848,45.8
  Top Layer w0.305: C2.1 C1.1 13.323,88.658 13.97,89.305 P1.9 13.97,95.631 ; P2.3 16.383,41.783 17.157,41.009 C16.1 ; P1.6 10.16,95.631 13.97,95.631 ; P1.20 26.67,98.044 26.543,98.171 ; P1.25 36.068,94.361 36.83,95.123 36.83,97.663 36.322,98.171 26.543,98.171 ; v1(36.576,73.914) 36.576,79.629 37.199,80.252 C22.1 ; C26.1 76.835,79.248 77.724,78.359 C23.2 ; 13.97,95.631 18.542,95.631 19.05,96.139 P1.14 19.05,97.536 19.812,98.298 26.416,98.298 26.543,98.171
  Top Layer w0.508: C2.1 2.921,88.404 v1(2.921,86.868) ; D2.1 33.655,2.286 34.925,1.016 57.023,1.016 57.658,1.651 59.021,1.651 ; R10.1 52.236,5.041 R9.1 54.522,5.041 56.422,3.141 D5.1 59.021,1.651 ; C37.1 C38.1 ; C43.1 80.367,24.856 J4.6 90.388,24.856 91.44,25.908 91.44,27.432 ; J4.14 83.226,12.278 83.815,11.689 J2.Shell@89.351,11.689 ; J4.9 87.691,28.006 ; C18.1 84.074,1.778 83.947,1.651 ; v1(84.455,57.543) 84.455,59.891 C11.2 84.148,63.574 85.432,64.858 R2.2 R1.2 ; J4.10 87.526,28.171 87.691,28.006 ; J2.5 89.351,8.964 J2.Shell@89.351,11.689 ; J1.1A 97.876,36.925 J4.12 ; 59.021,1.651 76.708,1.651 83.947,1.651 ; 83.947,1.651 88.213,1.651 89.351,2.789 94.851,2.789 97.023,2.789 98.326,4.092 98.326,12.982 ; 87.691,28.006 88.265,27.432 91.44,27.432 ; J2.Shell@89.351,11.689 94.851,11.689 97.033,11.689 98.326,12.982 ; 91.44,27.432 97.282,27.432 97.876,28.026 J4.12 ; J4.12 98.326,28.506 J4.13 98.326,12.982
  Top Layer w0.635: SW1.2 9.271,17.399 10.775,18.903 U2.21 15.385,15.603 16.129,14.859 17.21,14.859 ; C16.1 17.157,30.706 U2.13 U2.22 17.21,14.859 ; D2.1 D3.1 18.195,3.141 17.21,4.126 17.21,14.859 ; P1.25 34.925,93.726 37.338,93.726 38.354,92.71 C22.1 40.808,80.252 C20.2 46.881,81.862 U5.1 48.119,85.457 48.768,86.106 67.056,86.106 68.058,85.104 U6.1 68.058,78.726 ; C21.1 56.601,78.412 C24.2 67.744,78.412 68.058,78.726 ; C25.1 68.933,77.851 68.326,78.458 ; R2.2 88.9,70.739 88.709,70.929 ; J3.3 90.704,97.51 91.906,96.308 J3.2 91.906,79.153 C23.2 91.112,73.332 88.709,70.929 ; 68.058,78.726 68.326,78.458 ; 68.326,78.458 C30.2 88.466,70.686 88.709,70.929
  Bottom Layer w0.254: v1(41.275,9.525) 41.305,9.555 U4.15 46.341,11.035 46.609,11.303 C19.2 48.272,18.3 48.514,18.542 48.514,23.241 47.498,24.257 v1(47.498,27.305) ; C36.2 47.105,53.582 C35.2 47.256,53.733 C34.2 ; C33.2 51.943,50.419 51.435,50.927 C34.2 ; v1(53.848,45.72) 53.848,41.783 v1(54.102,41.529) ; v1(54.229,53.721) 54.217,53.733 C34.2 ; C31.2 61.837,43.573 62.357,43.053 66.802,43.053 ; 67.678,45.338 C15.2 ; v1@67.678,45.593 XT1.2 ; v1(67.691,45.593) 68.707,45.593 69.215,46.101 69.215,50.673 v1(69.076,50.812) ; v1(69.108,55.023) 70.771,55.023 ; C7.1 70.497,54.749 70.771,55.023 ; U1.26 75.835,54.523 U1.29 ; C13.1 76.708,46.482 76.253,46.027 C10.2 71.501,44.704 71.374,44.577 C15.2 ; U1.13 77.335,56.023 U1.29 ; U1.18 U1.29 ; C9.2@85.111,48.133 C9.2 85.111,43.455 84.709,43.053 66.802,43.053 ; 66.802,43.053 66.917,43.168 C15.2 ; 70.771,55.023 U1.4 U1.29
  Bottom Layer w0.305: C41.2 35.941,73.279 v1(36.576,73.914)
  Bottom Layer w0.508: v1(2.921,86.868) 2.921,68.834 3.429,68.326 U8.10 ; v1(84.455,57.543) C8.1 82.792,52.082 C12.1 84.455,52.07 85.111,51.414 C9.2@85.111,48.133 ; C9.2 93.98,47.752 94.669,47.063 J1.1A
NetC3_1: C3.1 C5.1 U1.11 | length 27.9
  Top Layer w0.254: v1(93.599,56.642) 94.234,56.642
  Top Layer w0.508: C3.1 94.234,56.642 94.234,54.43 C5.1
  Bottom Layer w0.254: U1.11 76.335,59.063 77.47,60.198 91.948,60.198 92.456,59.69 92.456,57.277 93.091,56.642 v1(93.599,56.642)
NetC3_2: C3.2 R1.1 | length 2.8
  Top Layer w0.508: C3.2 R1.1
NetC4_1: C4.1 C6.1 U1.12 | length 20.9
  Top Layer w0.508: C4.1 88.9,58.686 v1(88.9,56.769) C6.1
  Bottom Layer w0.254: U1.12 76.835,58.42 78.105,59.69 85.852,59.69 86.487,59.055 86.487,57.15 86.868,56.769 v1(88.9,56.769)
NetC4_2: C4.2 R2.1 | length 2.9
  Top Layer w0.508: C4.2 88.773,63.031 R2.1
NetC5_2: C5.2 J1.2 J1.2A J1.2B | length 13.6
  Top Layer w0.508: J1.2A 92.219,46.753 94.361,48.895 C5.2
NetC6_2: C6.2 J1.4 J1.4A J1.4B | length 13.7
  Top Layer w0.508: J1.4A 86.619,43.693 88.9,45.974 C6.2
NetC9_1: C9.1 C12.2 U1.20 | length 9
  Bottom Layer w0.254: U1.20 79.581,54.023 80.01,53.594 80.01,52.197 80.137,52.07 C12.2 81.28,48.133 C9.1
NetC10_1: C10.1 C13.2 U1.25 | length 9.7
  Bottom Layer w0.254: C10.1 72.718,48.26 74.676,48.26 76.188,49.772 C13.2 76.708,50.927 76.335,51.3 U1.25
NetC11_1: C11.1 C14.2 U1.19 | length 9.2
  Top Layer w0.254: v1(80.391,54.483) 80.698,54.79 C11.1
  Bottom Layer w0.254: U1.19 80.264,54.523 v1(80.391,54.483) ; v1@80.264,54.483 v1(80.391,54.483) ; C14.2 80.756,54.523 80.391,54.523 v1(80.391,54.483)
NetC17_1: C17.1 U3.6 | length 3.1
  Top Layer w0.254: C17.1 72.021,4.838 72.588,5.405 U3.6
NetC17_2: C17.2 U3.5 | length 3
  Top Layer w0.254: C17.2 72.038,6.055 U3.5
NetC18_2: C18.2 D1.1 J2.1 U3.2 U7.51 | length 76.8
  Top Layer w0.254: U7.51 67.849,44.8 68.199,44.45 68.199,27.813 v1(67.818,27.432) ; v1(70.612,27.432) 70.612,12.446 70.987,12.071 D1.1 76.835,11.817 v1(76.835,11.049) ; v1(76.835,4.699) 76.891,4.755 U3.2 ; C18.2 86.221,4.814 v1(86.233,4.826) 87.046,5.639 J2.1
  Bottom Layer w0.254: v1(67.818,27.432) v1(70.612,27.432) ; v1(76.835,11.049) v1(76.835,4.699) 86.106,4.699 v1(86.233,4.826)
NetC27_1: C27.1 C28.1 C29.1 C30.1 C31.1 C32.1 C33.1 C34.1 C35.1 C36.1 L1.2 U7.14 U7.30 U7.37 U7.46 U7.52 U7.62 U7.74 U7.83 U7.93 | length 104.9
  Top Layer w0.254: U7.14 44.696,50.3 45.403,49.593 U7.30 45.403,40.322 45.605,40.12 C29.1 ; C28.1 48.903,40.255 U7.37 48.903,47.76 49.403,48.26 v1(49.911,48.26)
  Top Layer w0.305: v1(46.903,56.094) U7.93 ; U7.83 51.903,55.781 v1(51.943,55.741) ; C27.1 53.403,40.184 U7.46 53.403,44.767 53.936,45.3 54.737,45.3 ; v1(54.737,44.958) 54.737,45.3 ; v1(54.737,50.419) 54.856,50.3 U7.62 ; v1(55.118,55.499) 55.919,56.3 U7.74 60.618,56.3 61.456,57.138 C32.1 61.456,60.083 60.325,61.214 L1.2 60.505,67.236 C30.1 ; v1(59.348,45.3) U7.52 54.737,45.3
  Bottom Layer w0.254: C36.1 45.339,50.026 v1(45.339,49.022) 49.53,49.022 49.911,48.641 v1(49.911,48.26) 54.356,48.26 54.737,48.641 v1(54.737,50.419)
  Bottom Layer w0.305: C36.1 45.605,54.368 46.458,55.221 C35.1 ; v1(46.903,56.094) 47.244,55.753 C35.1 ; v1(48.895,46.482) 49.022,46.609 54.356,46.609 54.737,46.228 v1(54.737,44.958) ; C33.1 v1(54.737,50.419) ; v1(55.118,55.499) 52.185,55.499 v1(51.943,55.741) C34.1 51.423,55.221 C35.1 ; v1(59.348,45.3) 59.387,45.339 C31.1
NetD2_2: D2.2 R6.1 | length 7
  Top Layer w0.254: R6.1 32.766,6.13 D2.2
NetD3_2: D3.2 R7.1 | length 6.8
  Top Layer w0.254: R7.1 30.734,11.469 D3.2
NetD4_1: D4.1 J3.1 | length 8.1
  Top Layer w0.635: J3.1 86.106,85.448 D4.1
NetD5_2: D5.2 R8.2 | length 2.6
  Top Layer w0.508: D5.2 57.531,7.659 R8.2
NetD6_1: D6.1 R9.2 | length 13.2
  Top Layer w0.203: D6.1 43.688,1.905 43.942,1.651 53.721,1.651 54.102,2.032 R9.2
NetD6_2: D6.2 U7.28 | length 38.6
  Top Layer w0.254: D6.2 43.688,8.001 44.831,9.144 v1(44.831,16.891) ; U7.28 44.403,31.035 44.831,30.607 v1(44.831,26.67) ; v1(44.831,18.415) v1(44.831,24.257)
  Bottom Layer w0.254: v1(44.831,16.891) v1(44.831,18.415) ; v1(44.831,24.257) v1(44.831,26.67)
NetD7_1: D7.1 R10.2 | length 5.4
  Top Layer w0.203: D7.1 47.024,3.302 R10.2
NetD7_2: D7.2 U7.29 | length 38.8
  Top Layer w0.254: U7.29 44.903,31.551 45.593,30.861 v1(45.593,26.797) ; v1(45.593,16.891) 45.593,7.239 46.863,5.969 D7.2 ; v1(45.593,18.542) v1(45.593,24.257)
  Bottom Layer w0.254: v1(45.593,16.891) v1(45.593,18.542) ; v1(45.593,24.257) v1(45.593,26.797)
NetJ1_3: J1.3 J1.3A J1.3B
NetJ1_5: J1.5 J1.5A J1.5B
NetJ2_4: J2.4 U7.56 | length 70.4
  Top Layer w0.254: U7.56 68.905,47.3 69.85,46.355 69.85,9.017 70.231,8.636 80.899,8.636 81.496,8.039 J2.4
NetJ4_2: J4.2 R31.2 U7.61 | length 57.9
  Top Layer w0.254: U7.61 60.944,49.8 61.214,49.53 61.214,48.387 61.722,47.879 76.073,47.879 76.454,47.498 76.454,20.955 76.953,20.456 J4.2 v1(84.7,20.456)
  Bottom Layer w0.254: v1(84.7,20.456) 84.709,20.447 R31.2
NetJ4_3: J4.3 R30.2 U7.64 | length 58.1
  Top Layer w0.254: U7.64 61.476,51.3 61.976,50.8 61.976,48.768 62.357,48.387 77.343,48.387 78.012,47.718 78.012,22.225 78.681,21.556 J4.3 v1@84.675,21.556
  Bottom Layer w0.254: v1(84.709,21.59) 84.963,21.59 85.471,22.098 R30.2
NetJ4_5: J4.5 R29.2 U7.10 | length 79.9
  Top Layer w0.254: v1(38.354,44.069) 38.354,26.289 38.862,25.781 v1(49.149,25.781) ; v1(38.378,52.427) 38.378,52.3 U7.10 ; v1(50.927,25.781) 67.691,25.781 67.945,25.527 v1(67.945,24.511) ; v1(81.915,23.749) 81.922,23.756 J4.5
  Top Layer w0.305: J4.5 83.233,23.749 v1(85.344,23.749)
  Bottom Layer w0.254: v1(38.354,44.069) 38.378,44.093 v1(38.378,52.427) ; v1(49.149,25.781) v1(50.927,25.781) ; v1(67.945,24.511) 67.945,24.003 68.199,23.749 v1(81.915,23.749)
  Bottom Layer w0.305: v1(85.344,23.749) 85.471,23.876 R29.2
NetJ4_7: J4.7 R28.2 U7.65 | length 54.3
  Top Layer w0.203: 62.738,51.308 62.738,49.403 63.119,49.022 78.232,49.022 78.867,48.387 78.867,26.543 79.454,25.956 J4.7 v1(84.376,25.956)
  Top Layer w0.254: U7.65 62.246,51.8 62.738,51.308
  Bottom Layer w0.203: v1(84.376,25.956) 84.455,26.035 85.217,26.035 85.598,25.654 R28.2
NetJ4_11: J4.11 R32.1 U7.44 | length 56.6
  Top Layer w0.203: v1(52.372,41.196) 52.403,41.196 U7.44
  Top Layer w0.254: J4.11 94.234,29.464 v1(94.234,30.441)
  Bottom Layer w0.203: v1(52.372,41.196) 52.372,33.48 52.832,33.02 93.218,33.02 94.234,32.004 v1(94.234,30.441)
  Bottom Layer w0.254: R32.1 v1(94.234,30.441)
NetP1_11: P1.11 U7.16 | length 69.6
  Top Layer w0.254: P1.11 16.51,50.546 17.756,49.3 U7.16
NetP1_13: P1.13 U7.88 | length 65.6
  Top Layer w0.254: P1.13 19.05,65.278 20.066,64.262 49.149,64.262 49.403,64.008 U7.88
NetP1_15: P1.15 U7.87 | length 63.8
  Top Layer w0.254: P1.15 21.59,65.278 22.098,64.77 49.53,64.77 49.903,64.397 U7.87
NetP1_19: P1.19 U7.85 | length 59.8
  Top Layer w0.254: P1.19 26.67,66.294 27.051,65.913 50.546,65.913 50.903,65.556 U7.85
NetP1_21: P1.21 U7.86 | length 66.5
  Top Layer w0.254: P1.21 29.21,95.377 28.956,95.631 25.781,95.631 25.4,95.25 25.4,65.786 25.908,65.278 50.165,65.278 50.403,65.04 U7.86
NetP1_23: P1.23 U7.76 | length 58.9
  Top Layer w0.254: P1.23 31.75,66.929 32.258,66.421 54.768,66.421 55.403,65.786 U7.76
NetP1_24: P1.24 U7.18 | length 60.9
  Top Layer w0.254: v1(30.48,66.929) 30.48,96.266 31.115,96.901 P1.24 ; v1(30.694,48.26) 30.734,48.3 U7.18
  Bottom Layer w0.254: v1(30.48,66.929) 30.48,48.26 v1(30.694,48.26)
NetP1_26: P1.26 U7.19 | length 58.9
  Top Layer w0.254: v1(33.02,67.056) 33.02,96.393 33.528,96.901 P1.26 ; v1@33.068,47.8 U7.19
  Bottom Layer w0.254: v1(33.02,47.752) v1(33.02,67.056)
NetP2_1: P2.1 R13.1 R15.1 SW1.1 | length 48.3
  Top Layer w0.254: SW1.1 5.334,5.842 6.262,6.77 ; R15.1 8.04,36.703 P2.1 2.159,35.687 2.159,7.366 2.755,6.77 6.262,6.77 ; R13.1 6.262,6.77
NetP2_4: P2.4 R11.2 | length 5
  Top Layer w0.254: P2.4 R11.2
NetP2_5: P2.5 R12.2 | length 5
  Top Layer w0.254: P2.5 8.04,46.863 R12.2
NetR3_1: R3.1 U1.28 U7.66 | length 35.8
  Top Layer w0.254: U7.66 62.635,52.3 63.246,51.689 63.246,49.911 63.627,49.53 v1@74.867,49.53 ; v1(74.835,49.562) v1@74.867,49.53 ; R3.1 76.835,49.784 76.581,49.53 v1@74.867,49.53
  Bottom Layer w0.254: v1(74.835,49.562) U1.28
NetR4_1: R4.1 U1.27 U7.67 | length 33.2
  Top Layer w0.254: U7.67 63.659,52.8 64.135,52.324 64.135,50.546 64.516,50.165 v1(75.311,50.165) 75.311,59.856 R4.1
  Bottom Layer w0.254: v1(75.311,50.165) 75.311,52.999 U1.27
NetR5_2: R5.2 U3.1 | length 3.9
  Top Layer w0.254: U3.1 78.808,3.234 78.828,3.214 R5.2
NetR6_2: R6.2 U2.32 | length 4.3
  Top Layer w0.254: U2.32 32.21,14.106 R6.2
NetR7_2: R7.2 U2.31 | length 4.3
  Top Layer w0.254: R7.2 30.71,13.907 U2.31
NetR11_1: R11.1 U7.25 | length 32.1
  Top Layer w0.254: R11.1 28.225,44.323 28.702,44.8 U7.25
NetR12_1: R12.1 U7.24 | length 32.6
  Top Layer w0.254: R12.1 29.083,46.99 30.773,45.3 U7.24
NetR14_1: R14.1 SW2.1 U7.71 | length 60.5
  Top Layer w0.254: v1(55.245,46.736) v1(55.245,48.006) ; v1(55.245,51.689) 55.245,54.483 55.562,54.8 U7.71 ; v1(55.499,6.731) 55.626,6.604 v1(55.626,9.144) ; v1(55.626,29.972) v1(55.626,33.655) ; v1(60.071,5.334) v1@60.198,5.461 ; R14.1 v1@60.198,5.461 ; SW2.1 61.341,4.318 v1@60.198,5.461
  Bottom Layer w0.254: v1(55.245,46.736) 55.626,46.355 v1(55.626,33.655) ; v1(55.245,48.006) v1(55.245,51.689) ; v1(55.499,6.731) 56.896,5.334 v1(60.071,5.334) ; v1(55.626,9.144) v1(55.626,29.972)
NetR15_2: R15.2 U7.15 | length 45.8
  Top Layer w0.254: v1(9.144,38.735) 9.867,38.012 R15.2 ; v1(18.796,50.165) 19.161,49.8 U7.15
  Bottom Layer w0.254: v1(9.144,38.735) 9.144,49.022 10.287,50.165 v1(18.796,50.165)
NetR16_1: R16.1 U7.89 | length 73.7
  Top Layer w0.254: v1@48.903,56.396 U7.89
  Bottom Layer w0.254: R16.1 7.405,77.128 7.659,77.382 48.729,77.382 49.403,76.708 49.403,64.389 50.038,63.754 53.467,63.754 53.721,63.5 53.721,62.103 53.34,61.722 49.403,61.722 48.895,61.214 v1(48.895,56.388)
NetR16_2: R16.2 U8.16 | length 3.6
  Bottom Layer w0.254: R16.2 12.313,76.2 U8.16
NetR17_1: R17.1 U8.7 | length 3.2
  Bottom Layer w0.254: U8.7 R17.1
NetR17_2: R17.2 U7.81 | length 35.5
  Top Layer w0.254: v1(52.832,62.484) 52.903,62.413 U7.81
  Bottom Layer w0.254: R17.2 46.99,68.326 47.498,67.818 47.498,63.246 47.879,62.865 52.451,62.865 v1(52.832,62.484)
NetR18_1: R18.1 U7.97 | length 63.4
  Top Layer w0.254: v1(17.653,78.105) 17.653,64.389 18.415,63.627 44.196,63.627 44.903,62.92 U7.97
  Bottom Layer w0.254: R18.1 6.223,74.041 5.588,74.676 5.588,77.597 6.096,78.105 v1(17.653,78.105)
NetR18_2: R18.2 U8.15 | length 3.7
  Bottom Layer w0.254: R18.2 9.74,74.676 U8.15
NetR19_1: R19.1 U8.9 | length 3.6
  Bottom Layer w0.254: R19.1 9.359,67.056 U8.9
NetR19_2: R19.2 U7.95 | length 46.6
  Top Layer w0.254: v1(29.21,61.468) v1(33.655,61.468) ; U7.95 45.903,61.397 v1(45.974,61.468)
  Bottom Layer w0.254: R19.2 7.405,62.191 8.128,61.468 v1(29.21,61.468) ; v1(33.655,61.468) v1(45.974,61.468)
NetR20_1: R20.1 U7.96 | length 28.7
  Top Layer w0.254: v1(45.212,63.627) 45.403,63.436 U7.96
  Bottom Layer w0.254: R20.1 27.94,66.294 28.194,66.548 28.194,67.183 28.702,67.691 44.831,67.691 45.212,67.31 v1(45.212,63.627)
NetR20_2: R20.2 U8.8 | length 3.5
  Bottom Layer w0.254: U8.8 24.13,67.056 R20.2
NetR21_1: R21.1 U8.1 | length 3.2
  Bottom Layer w0.254: U8.1 24.765,75.946 R21.1
NetR21_2: R21.2 U7.90 | length 39.1
  Top Layer w0.254: v1(48.387,63.627) 48.387,58.416 U7.90
  Bottom Layer w0.254: R21.2 47.752,76.073 48.387,75.438 v1(48.387,63.627)
NetU1_1: U1.1 XT1.3 | length 9.2
  Bottom Layer w0.254: XT1.3 67.678,50.787 68.326,51.435 72.39,51.435 73.025,52.07 73.025,52.959 73.589,53.523 U1.1
NetU1_5: U1.5 U7.43 | length 33.8
  Top Layer w0.203: U7.43 v1(51.903,52.197)
  Bottom Layer w0.203: v1(51.903,52.197) 60.071,52.197 60.579,52.705 60.579,54.483 61.619,55.523 U1.5
NetU1_6: U1.6 U7.77 | length 27.9
  Top Layer w0.203: v1(54.737,61.595) 54.903,61.429 U7.77 ; v1(61.595,61.595) 71.755,61.595 72.644,60.706 v1(72.644,56.007)
  Bottom Layer w0.203: v1(54.737,61.595) v1(61.595,61.595) ; v1(72.644,56.007) 72.66,56.023 U1.6
NetU1_7: U1.7 U7.68 | length 22.6
  Top Layer w0.254: U7.68 59.396,53.3 v1(59.563,53.467)
  Bottom Layer w0.254: v1(59.563,53.467) 59.563,57.023 60.706,58.166 72.39,58.166 72.771,57.785 72.771,57.031 73.279,56.523 U1.7
NetU1_8: U1.8 U7.33 | length 44.5
  Top Layer w0.254: v1(46.863,47.371) 46.903,47.331 U7.33 ; v1(64.389,54.356) v1(64.389,56.261) ; v1(64.389,57.531) 64.389,58.801 64.77,59.182 v1(71.882,59.182)
  Bottom Layer w0.254: v1(46.863,47.371) 62.484,47.371 62.992,47.879 62.992,51.562 64.389,52.959 v1(64.389,54.356) ; v1(64.389,56.261) v1(64.389,57.531) ; v1(71.882,59.182) 74.295,59.182 74.835,58.642 U1.8
NetU2_1: U2.1 U7.12 | length 27.4
  Top Layer w0.254: v1(35.147,50.673) 35.147,51.022 35.425,51.3 U7.12 ; v1(35.179,42.545) 35.179,31.13 35.433,30.876 U2.1
  Bottom Layer w0.254: v1(35.147,50.673) 35.179,50.641 v1(35.179,42.545)
NetU2_2: U2.2 U7.11 | length 29.2
  Top Layer w0.254: U2.2 33.782,30.725 v1(33.782,42.545) ; v1(33.71,50.673) 33.71,51.617 33.893,51.8 U7.11
  Bottom Layer w0.254: v1(33.71,50.673) 33.782,50.601 v1(33.782,42.545)
NetU2_3: U2.3 U7.39 | length 41.1
  Top Layer w0.254: U2.3 32.21,25.575 32.893,24.892 49.403,24.892 49.903,25.392 U7.39
NetU2_4: U2.4 U7.99 | length 49.8
  Top Layer w0.254: U2.4 30.71,42.926 30.964,43.18 36.322,43.18 v1(36.576,43.434) ; v1(36.576,52.451) 36.576,62.611 37.084,63.119 43.561,63.119 43.903,62.777 U7.99
  Bottom Layer w0.254: v1(36.576,43.434) 36.449,43.434 36.449,52.324 v1(36.576,52.451)
NetU2_11: U2.11 U7.3 | length 46